# Altium PCB PCB.PcbDoc
Units mil, origin at the board's own origin, x right, y up, seen from the top; angles counter-clockwise.
Board outline 2887.03 x 2121.03 mil, 2 copper layers (Top Layer, Bottom Layer); 72 components, 66 nets, 311 pads, 36 vias.
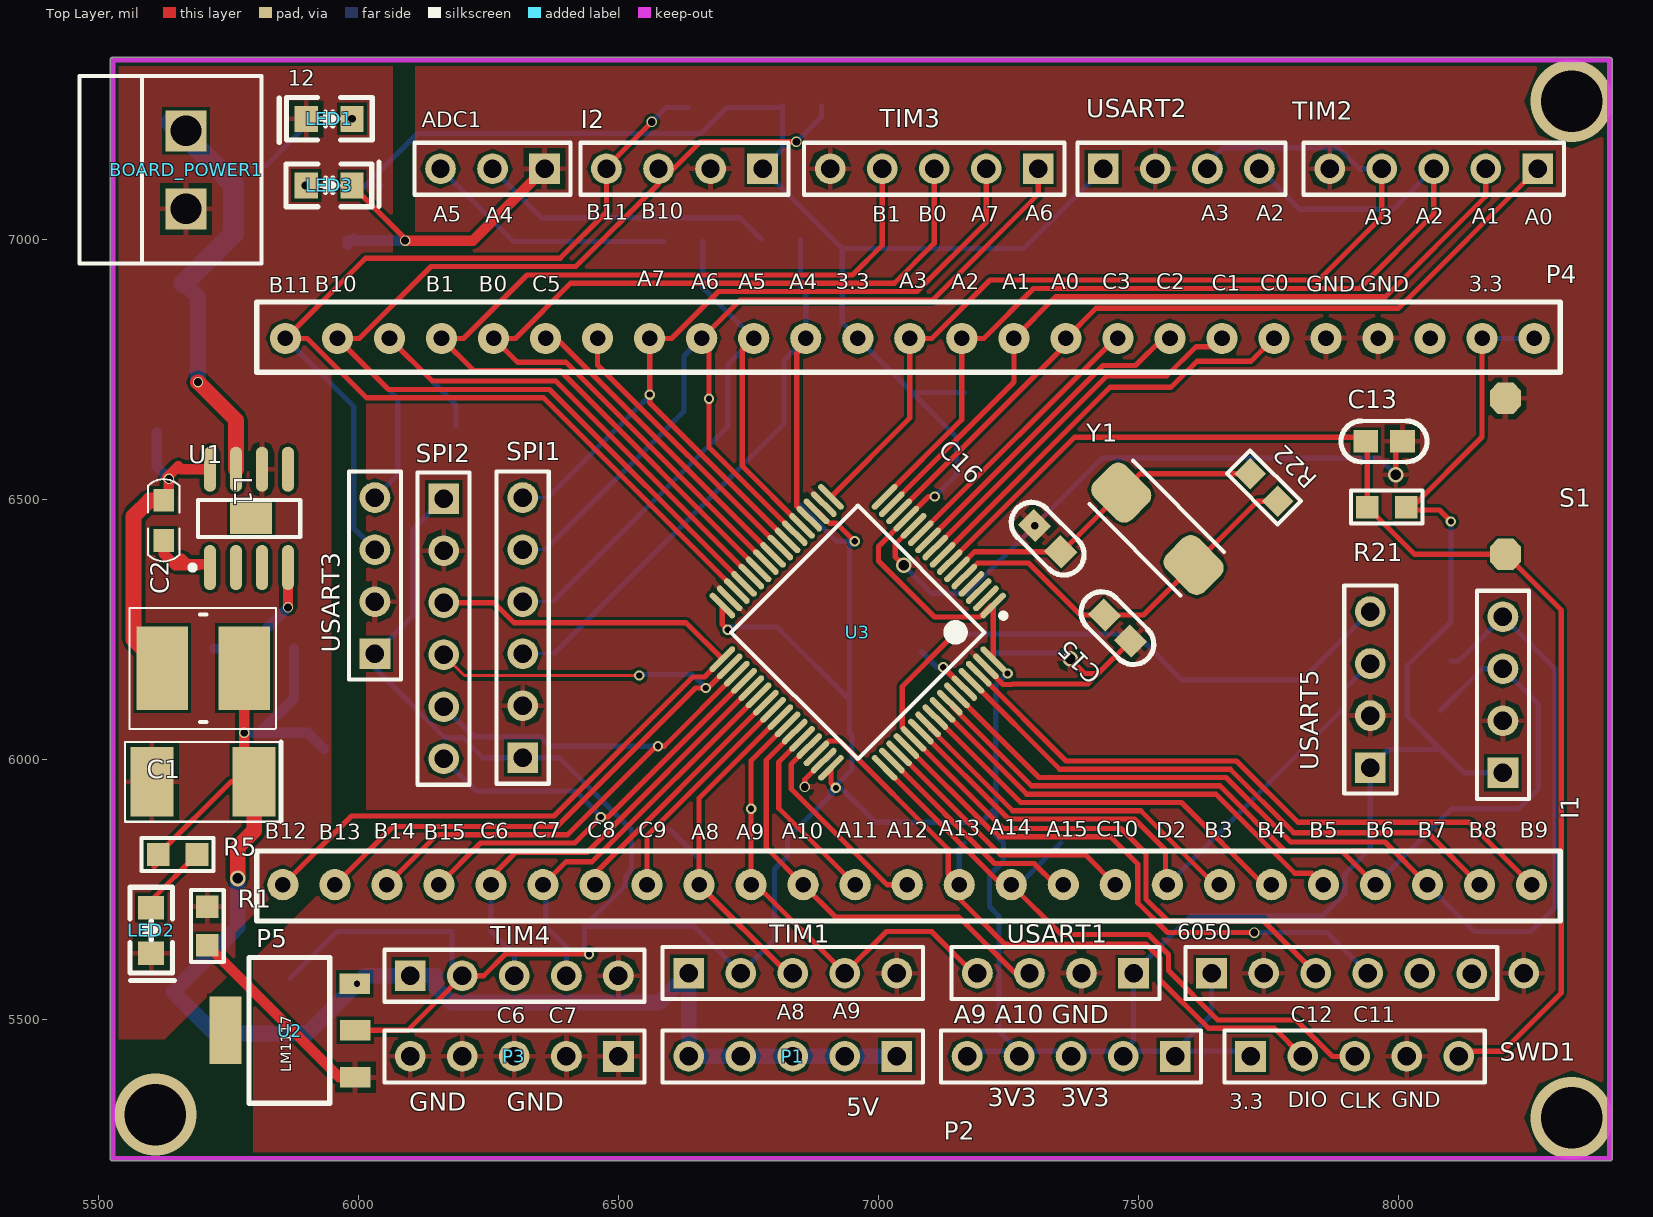
[diagram p0: Top Layer view]
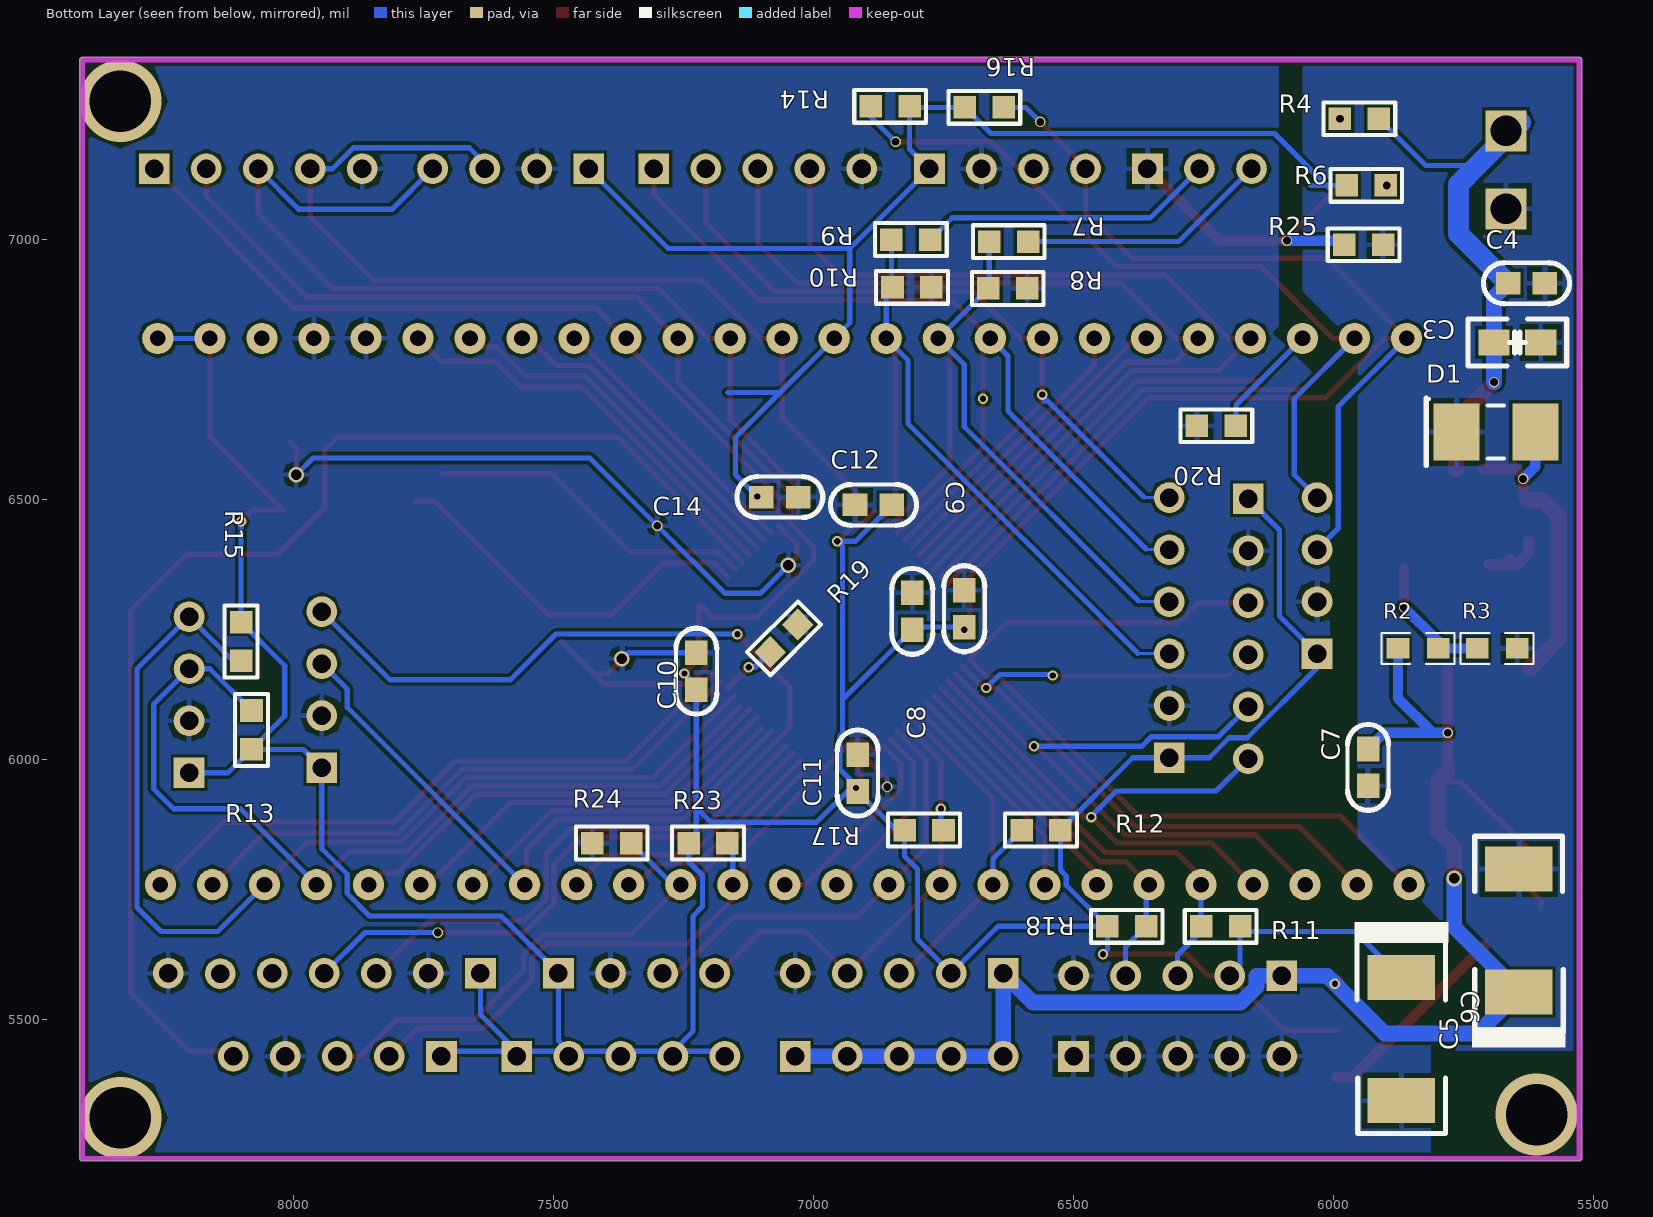
[diagram p1: Bottom Layer view, seen from below]

## Layer stack, top to bottom
Top Layer: signal copper 1.4
Dielectric: dielectric 12.6, FR-4, Dk 4.8
Bottom Layer: signal copper 1.4

## Board outline
5522.98,5234 ccw(c5528,5234) 5528,5228.98 8405,5228.98 ccw(c8405,5234) 8410.01,5234 8410.01,7345 ccw(c8405,7345) 8405,7350.02 5528,7350.02 ccw(c5528,7345) 5522.98,7345

## Design rules (kind name [scope] priority, off if disabled: settings)
Clearance [All] p1: gap=6
PolygonConnect [All] p1: connectstyle=Relief reliefconductorwidth=10 reliefentries=4 polygonreliefangle="90 Angle" airgapwidth=10
RoutingVias [All] p1: holewidth=28 width=50 viastyle="Through Hole" minholewidth=10 minwidth=10 maxholewidth=50 maxwidth=50
SolderMaskExpansion [All] p1: expansion=4
Width [All] p1: maxlimit=100 minlimit=6 preferedwidth=15 minimp=50.000000 maximp=50.000000 favimp=50.000000
28 further rules are at their usual default settings.

## Classes and differential pairs
component class 最小系统: C9 C10 C11 C12 C13 C14 C15 C16 P4 P5 R19 R20 R21 R22 R23 R24 S1 SWD1 U3 Y1
component class 原理图: 6050 ADC1 BOARD_POWER1 C1 C2 C3 C4 C5 C6 C7 C8 D1 I1 I2 L1 LED1 LED2 LED3 P1 P2 P3 R1 R2 R3 R4 R5 R6 R7 R8 R9 R10 R11 R12 R13 R14 R15 R16 R17 R18 SPI1 SPI2 TIM1 TIM2 TIM3 TIM4 U1 U2 USART1 USART2 USART3 USART5

## Components (designator, comment, footprint, x,y, rotation, side; value= is the part's Value field where it differs from the comment)
6050 "Header 6" "HDR1X6- duplicate" 7640,5590 r0 top
ADC1 "Head_3" HDR1X3 6358,7136 r180 top
BOARD_POWER1 "Header 2" Green_2P 5764,7134 r270 top
C1 "107UF" "6032C  TA" 5800,5958 r180 top
C2 "104" "0603- C" 5626,6460 r90 top
C3 "10uf" 0805C 5602,6802 r0 bottom
C4 "Cap" CAP-MLCC-0603 5594,6916 r180 bottom
C5 "Cap Pol1" 6032C 5644,5554 r270 bottom
C6 "Cap Pol1" 6032C 5870,5581.22 r90 bottom
C7 "Cap" CAP-MLCC-0603 5934,5950 r270 bottom
C8 "Cap" CAP-MLCC-0603 6810,6320.87 r90 bottom
C9 "Cap" CAP-MLCC-0603 6710,6255 r270 bottom
C10 "Cap" CAP-MLCC-0603 7225,6135 r270 bottom
C11 "Cap" CAP-MLCC-0603 6915,5939.13 r270 bottom
C12 "Cap" CAP-MLCC-0603 6849.13,6490 r180 bottom
C13 "Cap" CAP-MLCC-0603 7936,6612 r180 top
C14 "Cap" CAP-MLCC-0603 7100,6505 r0 bottom
C15 "Cap" CAP-MLCC-0603 7484,6228 r315 top
C16 "Cap" CAP-MLCC-0603 7300,6450 r135 top
D1 "D" "D RS1M" 5764,6630 r180 bottom
I1 "Header 4" HDR1X4 8200,5975 r90 top
I2 "Header 4" HDR1X4 6777,7136 r180 top
L1 "L" CD_54 5702,6176 r0 top
LED1 "lED" 0805D 5988,7232 r180 top
LED2 "lED" 0805D 5602,5716 r270 top
LED3 "lED" 0805D 5900,7104 r0 top
P1 "Header 5" HDR1X5 7035,5430 r180 top
P2 "Header 5" HDR1X5 7570,5430 r180 top
P3 "Header 5" HDR1X5 6500,5430 r180 top
P4 "IO" "Header 25" 5860,6810 r0 top
P5 "IO" "Header 25" 8255,5760 r180 top
R1 "Res1" RES-0603 5710,5718 r90 top
R2 "10K" 0603-R 5838,6214 r0 bottom
R3 "3.24K" 0603-R 5686,6214 r180 bottom
R4 "Res1" RES-0603 5988,7232 r0 bottom
R5 "Res1" RES-0603 5690,5818 r0 top
R6 "Res1" RES-0603 5900,7104 r180 bottom
R7 "Res1" RES-0603 6662,6996 r0 bottom
R8 "Res1" RES-0603 6664,6906 r0 bottom
R9 "Res1" RES-0603 6850,7000 r0 bottom
R10 "Res1" RES-0603 6848,6908 r0 bottom
R11 "Res1" RES-0603 6180,5680 r180 bottom
R12 "Res1" RES-0603 6525.2,5865 r180 bottom
R13 "Res1" RES-0603 8080,6094.8 r90 bottom
R14 "Res1" RES-0603 6890,7256 r0 bottom
R15 "Res1" RES-0603 8100,6190 r270 bottom
R16 "Res1" RES-0603 6634,7254 r180 bottom
R17 "Res1" RES-0603 6824.8,5865 r0 bottom
R18 "Res1" RES-0603 6435,5680 r0 bottom
R19 "Res1" RES-0603 7082.89,6207.11 r315 bottom
R20 "Res1" RES-0603 6188,6642 r180 bottom
R21 "Res1" RES-0603 7939.13,6485.87 r180 top
R22 "Res1" RES-0603 7714,6550 r135 top
R23 "Res1" RES-0603 7165.2,5840 r180 bottom
R24 "Res1" RES-0603 7350,5840 r180 bottom
R25 "Res1" RES-0603 5980,6990 r0 bottom (schematic designator R1)
S1 "SW-PB" "key - duplicate" 8205,6515 r90 top
SPI1 "Header 6" HDR1X6 6316,6004 r90 top
SPI2 "Header 6" HDR1X6 6164,6502 r270 top
SWD1 "Header 5" HDR1X5 7715,5430 r0 top
TIM1 "Header 5" HDR1X5 6635,5590 r0 top
TIM2 "Header 5" HDR1X5 8267,7136 r180 top
TIM3 "Header 5" HDR1X5 7307,7136 r180 top
TIM4 "Header 5" HDR1X5 6100,5585 r0 top
U1 "TPS5430" SOIC-8piN 5790,6464 r90 top
U2 "tlv1117-3.3" LM1117 5870,5470 r90 top
U3 "stm32F103RCT6" STM32F103RCT6 6960,6245 r225 top
USART1 "Header 4" HDR1X4 7490,5590 r180 top
USART2 "Header 4" HDR1X4 7432,7136 r0 top
USART3 "Header 4" HDR1X4 6032,6204 r90 top
USART5 "Header 4" HDR1X4 7945,5985 r90 top
Y1 "8M" Osc-6032 7536,6444 r315 top

## Footprints (in the part's own frame and the unit in brackets; to place one, negate y for a bottom-side part, rotate by r counter-clockwise, add the part's x,y. Pads: shape width x height; smd on the part's side, far side on the other; paste and mask are expansions set on the pad)
"0603- C" [mm] "贴片带丝印"
  rect 1.1x1 smd: 1(-0.977,0) 2(0.977,0)
  silkscreen extent -1.99,-0.76 2.02,0.76, body extent -1.14,-0.38 1.14,0.38, height 1
0603-R [mm] "贴片带丝印"
  rect 1.1x1 smd: 1(-0.977,0) 2(0.977,0)
  silkscreen extent -1.78,-0.76 1.78,0.76, body extent -1.14,-0.38 1.14,0.38, height 1
0805C [mil]
  rect 60x50 smd: 1(0,0) 2(90,0)
  silkscreen extent -50,-45 140,45
0805D [mil]
  rect 45x50 smd: A(0,0) K(88,0)
  silkscreen extent -39,-41 140,45
6032C [mm]
  rect 2.2x3.3 smd: 1(0,0) 2(-6,0)
  silkscreen extent -7.6,-2.3 2.72,2.27
"6032C  TA" [mm]
  rect 2.1x3.4 smd: 1(0,0) 2(5,0)
  silkscreen extent -1.31,-1.93 6.31,1.96, body extent -0.6,-1.7 5.6,1.7, height 2.9
CAP-MLCC-0603 [mm]
  rect 1.2x1.1 smd: 1(0,0) 2(-1.8,0)
  silkscreen extent -3,-1 1.2,1, body extent -1.77,-0.47 -0.02,0.48, height 0.85
CD_54 [mm]
  rect 2.5x4.064 smd: 1(-2,0) 2(2,0)
  silkscreen extent -3.61,-2.97 3.56,2.95, body extent -3,-2.7 3,2.7, height 4
"D RS1M" [mm]
  rect 2.25x2.8 smd: A(0,0) K(3.85,0)
  silkscreen extent -1.47,-1.63 2.32,1.66, body extent -0.72,-1.4 4.57,1.39, height 2.3
Green_2P [mm]
  rect 2x2 hole 1.5: 1(-1.905,-2.413) 2(1.905,-2.413)
  silkscreen extent -4.57,-7.62 4.57,1.27
HDR1X3 [mm] "Connector; Header; 3 Position"
  rect 1.5x1.5 hole 0.9: 1(0,0)
  round 1.5 hole 0.9: 2(2.54,0) 3(5.08,0)
  silkscreen extent -1.27,-1.27 6.35,1.27
HDR1X4 [mm] "Connector; Header; 4 Position"
  rect 1.5x1.5 hole 0.9: 1(0,0)
  round 1.5 hole 0.9: 2(2.54,0) 3(5.08,0) 4(7.62,0)
  silkscreen extent -1.27,-1.27 8.89,1.27
HDR1X5 [mm] "Connector; Header; 5 Position"
  rect 1.5x1.5 hole 0.9: 1(0,0)
  round 1.5 hole 0.9: 2(2.54,0) 3(5.08,0) 4(7.62,0) 5(10.16,0)
  silkscreen extent -1.27,-1.27 11.43,1.27
HDR1X6 [mm] "Connector; Header; 5 Position"
  rect 1.5x1.5 hole 0.9: 1(0,0)
  round 1.5 hole 0.9: 2(2.54,0) 3(5.08,0) 4(7.62,0) 5(10.16,0) 6(12.7,0)
  silkscreen extent -1.27,-1.27 13.97,1.27
"HDR1X6- duplicate" [mm]
  rect 1.5x1.5 hole 0.9: 1(0,0)
  round 1.5 hole 0.9: 2(2.54,0) 3(5.08,0) 4(7.62,0) 5(10.16,0) 6(12.7,-0.025)
  silkscreen extent -1.27,-1.27 13.94,1.27
"Header 25" [mil]
  round 60 hole 30: 1(0,0) 2(100,0) 3(200,0) 4(300,0) 5(400,0) 6(500,0) 7(600,0) 8(700,0) 9(800,0) 10(900,0) 11(1000,0) 12(1100,0) 13(1200,0) 14(1300,0) 15(1400,0) 16(1500,0) 17(1600,0) 18(1700,0) 19(1800,0) 20(1900,0) 21(2000,0) 22(2100,0) 23(2200,0) 24(2300,0) 25(2400,0)
  silkscreen extent -55,-65 2450,70
"key - duplicate" [mil]
  oct 60x60 smd: 1(-120,0) 2(180,0)
LM1117 [mm]
  rect 1x1.5 smd: 1(-2.043,-3.148) 2(0.256,-3.148) 3(2.53,-3.123)
  rect 3.3x1.549 smd: 4(0.254,3.175)
  silkscreen extent -3.3,-1.91 3.81,2.03
Osc-6032 [mm]
  rrect50% 2.6x2.2 smd: 1(-2.5,0) 2(2.5,0)
  silkscreen extent -3.2,-1.5 3.1,1.5
RES-0603 [mm]
  rect 1.1x1.1 smd: 1(0,0) 2(-1.9,0)
  silkscreen extent -2.7,-0.8 0.8,0.8, body extent -1.8,-0.47 -0.1,0.48, height 0.6
SOIC-8piN [mm] "SOIC, 8-Leads, Body 4.90x3.90mm, Pitch 1.27mm, IPC Medium Density"
  rect 1.528x2.036 smd: 0(0,-0.102)
  oval 2.2x0.6 smd: 1(-2.4,1.905) 2(-2.4,0.635) 3(-2.4,-0.635) 4(-2.4,-1.905) 5(2.4,-1.905) 6(2.4,-0.635) 7(2.4,0.635) 8(2.4,1.905)
  silkscreen extent -2.52,-2.5 0.9,2.88, body extent -2,-2.5 2,2.5, height 1.7
STM32F103RCT6 [mm]
  oval 1.65x0.3 smd: 1(-5.6,3.75) 2(-5.6,3.25) 3(-5.6,2.75) 4(-5.6,2.25) 5(-5.6,1.75) 6(-5.6,1.25) 7(-5.6,0.75) 8(-5.6,0.25) 9(-5.6,-0.25) 10(-5.6,-0.75) 11(-5.6,-1.25) 12(-5.6,-1.75) 13(-5.6,-2.25) 14(-5.6,-2.75) 15(-5.6,-3.25) 16(-5.6,-3.75) 33(5.6,-3.75) 34(5.6,-3.25) 35(5.6,-2.75) 36(5.6,-2.25) 37(5.6,-1.75) 38(5.6,-1.25) 39(5.6,-0.75) 40(5.6,-0.25) 41(5.6,0.25) 42(5.6,0.75) 43(5.6,1.25) 44(5.6,1.75) 45(5.6,2.25) 46(5.6,2.75) 47(5.6,3.25) 48(5.6,3.75)
  oval 0.3x1.65 smd: 17(-3.75,-5.6) 18(-3.25,-5.6) 19(-2.75,-5.6) 20(-2.25,-5.6) 21(-1.75,-5.6) 22(-1.25,-5.6) 23(-0.75,-5.6) 24(-0.25,-5.6) 25(0.25,-5.6) 26(0.75,-5.6) 27(1.25,-5.6) 28(1.75,-5.6) 29(2.25,-5.6) 30(2.75,-5.6) 31(3.25,-5.6) 32(3.75,-5.6) 49(3.75,5.6) 50(3.25,5.6) 51(2.75,5.6) 52(2.25,5.6) 53(1.75,5.6) 54(1.25,5.6) 55(0.75,5.6) 56(0.25,5.6) 57(-0.25,5.6) 58(-0.75,5.6) 59(-1.25,5.6) 60(-1.75,5.6) 61(-2.25,5.6) 62(-2.75,5.6) 63(-3.25,5.6) 64(-3.75,5.6)
  silkscreen extent -5.72,-4.38 4.37,4.57, body extent -5,-5 5,5, height 1.6

## Part data
6050: "接插件"
BOARD_POWER1: "Header, 2-Pin"
C1: library part Cap_2, "钽电容"
C2 C3: library part Cap
C4 C7 C8 C13: "Capacitor"
C5 C6: "Polarized Capacitor (Radial)"
C9 C10 C11 C12 C14 C15 C16: library part Cap_1, "Capacitor"
I1 I2 USART1 USART2 USART3 USART5: "Header, 4-Pin"
L1: "电感"
LED1 LED2 LED3: library part 00-D-LED, "LED"
P1 P2 P3 SWD1 TIM1 TIM2 TIM3 TIM4: "Header, 5-Pin"
P4 P5: library part "Header 25", "Header, 25-Pin"
R1 R4 R5 R6 R7 R8 R9 R10 R11 R12 R13 R14 R15 R16 R17 R18 R25: "Resistor"
R2 R3: library part R
R19 R20 R21 R22 R23 R24: library part Res1_1, "Resistor"
S1: "Switch"
SPI1 SPI2: "Header, 6-Pin"
U2: library part LM1117IMP-5.0, "800mA Low-Dropout Linear Regulator"
Y1: library part C-Osc, "Crystal Oscillator"

## Free pads (board coordinates)
  round 59 hole 35.43: 0(8240,5590)

## Via types
v1: diameter 20, hole 12, Top Layer to Bottom Layer, 17 vias
v2: diameter 20, hole 15, Top Layer to Bottom Layer, 12 vias
v3: diameter 30, hole 20, Top Layer to Bottom Layer, 4 vias
v4: diameter 157.48, hole 118.11, Top Layer to Bottom Layer, 3 vias

## Nets (pads, with @x,y where several pads share a name; then routed paths per layer and width w, separated by ;. In a path a pad name is that pad's centre, name@x,y a point inside that pad or via, vN(x,y) a via of type N, cw(c..) or ccw(c..) an arc to the next point about the centre after c; other vN are vias at no path point)
3V3: 6050.1 C6.1 C8.2 C9.1 C10.1 C11.1 C12.1 C14.1 I1.1 I2.1 P2.1 P2.2 P2.3 P2.4 P2.5 P4.12 P4.24 P4.25 R6.2 R11.1 R12.1 R13.2 R14.2 R15.2 R16.2 R17.1 R18.1 R21.2 R23.2 SPI1.1 SPI2.1 SWD1.1 TIM1.2 TIM4.2 U2.2 U3.1 U3.13 U3.19 U3.32 U3.48 U3.64 USART1.1 USART2.1 USART3.1 USART5.1 | length 11393.6
  Top Layer w10: U2.2 6095.08,5480.08 TIM4.2 6241.27,5585 6282.8,5626.53 v1(6443.47,5626.53) ; U3.32 6699.71,6260.29 v1(6710,6250) ; U3.19 6883.18,6477.45 6905.95,6454.68 6919.32,6454.68 v1(6954,6420) ; U3.48 6908.5,5955.5 v1(6918,5946) ; v1(7108,6506) 7095.73,6506 U3.13 7000,6410.27 7000,6382 7107.28,6274.72 7194.59,6274.72 7216.36,6296.5 U3.1 U3.64 v1(7247.9,6165.9) ; v1(8100,6458) 8078,6480 8019.8,6480 8160,6620.2 P4.24
  Bottom Layer w10: C6.1 5958.78,5670 6180,5670 6180,5605 TIM4.2 ; R6.2 6044,7104 ; 6010,7100 6114,7204 6658.8,7204 R16.2 6813.2,7254 R14.2 6815.2,7174.2 I2.1 6930,6983 ; SPI2.1 6104,6442 6104,6276 USART3.1 6032,6176.69 6166.16,6042.53 6200.85,6042.53 6239.37,6004 SPI1.1 6386.2,6004 R12.1 6525.2,5788.18 6514,5776.98 6514,5759 R18.1 ; v1(6443.47,5626.53) 6435,5635 R18.1 ; C9.1@6707,6252 C9.1 6805,6255 C8.2 6944,6116 ; C12.1 6919.13,6420 v1(6954,6420) 6944,6410 6944,6116 ; v1(6918,5946) 6928,5946 6994,5880 7197,5880 7225,5908 ; v1(7108,6506) 7150,6548 7150,6620 7064,6706 ; 7165.2,6706 7064,6706 ; P2.5@7170,5440 P2.4@7270,5440 ; v1(7247.9,6165.9) 7225,6143 C10.1 7225,5908 ; USART2.1 7279,6983 6930,6983 ; 6050.1 7640,5510 P2.1@7570,5440 ; SWD1.1@7715,5440 P2.1@7570,5440 ; v1(8100,6458) R15.2 8016,6180.8 8016,6084 R13.2 ; P4.24@8160,6832 P4.24 P4.25 ; I1.1 8125,5975 R13.2 ; R18.1 6645,5680 TIM1.2 6800,5655 6800,5790 6824.8,5814.8 R17.1 6840.87,5865 C11.1 6906.38,5939.13 6948.65,5981.41 6948.65,6045.62 6944,6050.28 6944,6116 ; 6930,6983 6930,6840 P4.12 7064,6706 ; 7225,5908 7225,5855 R23.2 7240,5804.4 7213,5777.4 7213,5718 7231.53,5699.47 7231.53,5478.47 P2.4@7270,5440 ; P2.4@7270,5440 P2.2@7470,5440 ; P2.2@7470,5440 7490,5460 USART1.1 7600,5700 7852.98,5700 7896,5743.02 7896,5780 7945,5829 USART5.1 7980,6020 R13.2 ; P2.2@7470,5440 P2.1@7570,5440
5V: C1.1 C5.1 C7.2 L1.2 P1.1 P1.2 P1.3 P1.4 P1.5 R2.2 R5.2 TIM1.1 TIM4.1 U2.3 | length 3006.4
  Top Layer w10: 5607.2,5794 R5.2@5623.2,5810 ; R5.2 5755.2,5958 C1.1
  Top Layer w20: C1.1@5780.74,5977.26 v2(5780.74,6052) L1.2
  Top Layer w30: v3(5768,5772) 5768,5832 5800,5864 C1.1 C1.1@5780.74,5977.26 ; U2.3@5995.3,5571.95 v1(5997.62,5569.62)
  Bottom Layer w20: v2(5780.74,6052) 5810,6052 ; R2.2 5876.46,6118.46 5810,6052 ; C7.2 5902.87,6052 5810,6052
  Bottom Layer w30: v3(5768,5772) 5768,5678 C5.1 5724,5474 5902,5474 v1(5997.62,5569.62) 6013,5585 TIM4.1 6148.47,5585 6148.47,5563.66 6178.66,5533.47 6578.47,5533.47 TIM1.1 P1.5 P1.4 P1.3 P1.2 P1.1
12V: BOARD_POWER1.1 C3.2 C4.2 R4.2 U1.7 | length 1023.2
  Top Layer w30: v2(5692,6726) 5765,6653 U1.7
  Bottom Layer w10: 5724,7142 5823.2,7142 R4.2
  Bottom Layer w30: C4.2 5692,6888.87 C3.2 v2(5692,6726)
  Bottom Layer w40: BOARD_POWER1.1@5641,7225 5724,7142 5760,7106 5760,7011.13 C4.2
BOOT0: R19.1 U3.60 | length 110.4
  Top Layer w11: v1(7124.44,6178) U3.60
  Bottom Layer w11: R19.1 7112,6178 v1(7124.44,6178)
BOOT1: P4.3 R20.1 U3.28 | length 1106
  Top Layer w10: P4.3 6142,6728 6379.56,6728 U3.28
  Bottom Layer w10: P4.3 6188,6682 R20.1
GND: 6050.2 ADC1.1 C6.2 C8.1 C9.2 C10.2 C11.2 C12.2 C13.2 C14.2 C15.1 C16.1 I1.2 I2.2 LED3.K P3.1 P3.2 P3.3 P3.4 P3.5 P4.21 P4.22 pad.0 R1.2 R8.2 R10.2 R19.2 R20.2 R24.2 R25.1 S1.2 SPI1.2 SPI2.2 SWD1.4 TIM1.5 TIM2.5 TIM3.5 TIM4.5 U2.1 U3.12 U3.18 U3.31 U3.47 U3.63 USART1.2 USART2.2 USART3.2 USART5.2 | length 2857
  Top Layer w10: LED3.K 6090,7002 v2(6090,6998) ; v2(6858,5948) 6858,5962.05 U3.47 ; v3(7048,6374) 7032,6390 7032,6414.44 U3.12 ; U3.63 7206.37,6177.72 7239.2,6144.9 7256.59,6144.9 7257.7,6146 7402,6146 7422,6166 ; v3(7368,6194) 7396,6166 7422,6166 ; C15.1 7422,6166 ; v3(7994,6548) 7994,6599.13 C13.2
  Top Layer w20: R1.2 5963.64,5389.55 U2.1 ; v2(6090,6998) 6220,6998 ADC1.1
  Bottom Layer w10: C11.2@6898,6002 C11.2@6903.3,6002 ; v3(7048,6374) 7102,6320 7170,6320 v2(7300,6450) 7430,6580 7962,6580 v3(7994,6548) ; C10.2 7356.13,6205.87 v3(7368,6194)
  Bottom Layer w20: R25.1 R25.1@5988,6998 ; R25.1@5980,6998 R25.1@5988,6998 ; R25.1@5992,7002 R25.1@5988,6998 ; v2(6090,6998) R25.1@5988,6998
NetADC1_2: ADC1.2 R9.2 | length 573.5
  Bottom Layer w10: ADC1.2 6352,7042 6733.2,7042 R9.2
NetADC1_3: ADC1.3 R7.2 | length 487.2
  Bottom Layer w10: ADC1.3 6298,6996 R7.2
NetC2_1: C2.1 U1.1 | length 145.8
  Top Layer w20: C2.1 5626,6396 5648,6374 5691.49,6374 ; 5660.77,6386.77 5671.54,6376 5702,6376
NetC2_2: C2.2 D1.K L1.1 U1.8 | length 624.5
  Top Layer w20: C2.2 5636,6508.46 v2(5636,6540) ; v2@5632.77,6543.23 5654.02,6564.49 5660.02,6558.49 U1.8
  Top Layer w30: L1.1 5568,6231.26 5568,6468 5598.46,6498.46 C2.2
  Bottom Layer w20: D1.K 5612.43,6563.57 v2(5636,6540)
NetLED1_A: LED1.A R4.1
  other v2: 5988,7232
NetLED2_A: LED2.A R5.1 | length 138.5
  Top Layer w10: LED2.A 5602,5730 R5.1
NetLED3_A: LED3.A R6.1
  other v2: 5898,7104
NetR2_1: R2.1 R3.1 U1.4 | length 257.7
  Top Layer w20: v2(5865,6293) U1.4
  Bottom Layer w20: R3.1 R2.1 5799.54,6227.54 v2(5865,6293)
NRST: C13.1 R21.1 S1.1 SWD1.5 U3.7 | length 2455.5
  Top Layer w10: U3.7 7376.76,6620 7914.13,6620 7939.13,6595 R21.1 8030,6395 S1.1 8312,6288 8312,5552 8200,5440 SWD1.5@8115,5440
OLEDRESET: P4.7 U3.24 | length 547.6
  Top Layer w10: P4.7 6460,6758.92 U3.24
OSC32_IN: U3.3
OSC32_OUT: U3.4
OSCIN: C15.2 R22.2 U3.5 Y1.2 | length 745.1
  Top Layer w10: U3.5 7190.44,6378 7288,6378 7387.89,6278.11 C15.2 7509.3,6278.11 Y1.2 7728.3,6497.11 R22.2
OSCOUT: C16.2 R22.1 U3.6 Y1.1 | length 639.5
  Top Layer w10: U3.6 7184.49,6399.89 C16.2 7352.7,6399.89 Y1.1 7502.81,6550 R22.1
PA0: P4.16 TIM2.1 U3.14 | length 1507.4
  Top Layer w10: U3.14 7360,6798.11 P4.16 7418,6868 7999,6868 TIM2.1
PA1: P4.15 TIM2.2 U3.15 | length 1488.9
  Top Layer w10: U3.15 7260,6725.95 P4.15 7340,6890 7974,6890 8167,7083 TIM2.2
PA2: P4.14 TIM2.3 U3.16 USART2.4 | length 1858.8
  Top Layer w10: U3.16 7160,6653.79 P4.14 7202.02,6810 7298.02,6906 7924,6906 8067,7049 TIM2.3
  Bottom Layer w10: USART2.4 7810,7058 7989,7058 TIM2.3
PA3: P4.13 TIM2.4 U3.17 USART2.3 | length 1839
  Top Layer w10: U3.17 7060,6656.8 P4.13 7102.02,6810 7214.02,6922 7846,6922 7967,7043 TIM2.4
  Bottom Layer w10: USART2.3 7632,7147.06 7661.47,7176.53 7883.79,7176.53 7924.31,7136 TIM2.4
PA4: P4.11 R9.1 R10.1 SPI1.3 U3.20 | length 1422.6
  Top Layer w10: P4.11 6845.96,6795.96 6845.96,6785.08 6842.88,6782 6842.88,6487.39 U3.20
  Bottom Layer w6: SPI1.3 6376,6204
  Bottom Layer w10: 6377,6205 6818,6646 6818,6768 P4.11 6860,6896 6850,6906 R9.1
PA5: P4.10 R7.1 R8.1 SPI1.4 U3.21 | length 1366.1
  Top Layer w10: P4.10 6738,6788 6738,6564.44 U3.21
  Bottom Layer w6: SPI1.4 6374,6304
  Bottom Layer w10: 6375,6305 6710,6640 6710,6760 P4.10 R8.1 6662,6908 R7.1
PA6: P4.9 SPI1.5 TIM3.1 U3.22 | length 1833.7
  Top Layer w10: U3.22 6674,6600.6 v1(6674,6693.8) 6674,6796 P4.9 6734,6884 7104,6884 7307,7087 TIM3.1
  Bottom Layer w6: SPI1.5 6360,6404
  Bottom Layer w10: 6361,6405 6626,6670 6626,6776 P4.9 ; v1(6674,6693.8) v1@6675.2,6695
PA7: P4.8 SPI1.6 TIM3.2 U3.23 | length 1656.7
  Top Layer w10: U3.23 6560,6686.76 v1(6560,6702) P4.8 6602.02,6810 6692.02,6900 7074,6900 7207,7033 TIM3.2
  Bottom Layer w6: SPI1.6 6364,6504
  Bottom Layer w10: 6365,6505 6550,6690 6556.76,6690
PA8: P5.17 R12.2 TIM1.3 U3.41 | length 765
  Top Layer w10: P5.17 6655,5926.08 U3.41
  Top Layer w11: P5.17 6825,5590 TIM1.3
  Bottom Layer w10: R12.2 6655,5810 P5.17
PA9: P5.16 R17.2 TIM1.4 U3.42 USART1.4 | length 952
  Top Layer w10: U3.42 6755,5998.24 v1(6755,5906) P5.16 6765,5760 TIM1.4 7015,5670 7102,5670 7182,5590 USART1.4
  Bottom Layer w10: R17.2 6755,5870 v1(6755,5906)
PA10: P5.15 U3.43 USART1.3 | length 851.9
  Top Layer w10: U3.43 6784,5999.4 6784,5831 P5.15 6917,5698 7154,5698 7262,5590 USART1.3
PA11: P5.14 U3.44 | length 359.8
  Top Layer w10: U3.44 6808,5995.56 6808,5907 P5.14
PA12: P5.13 U3.45 | length 396.1
  Top Layer w10: U3.45 6832,5991.73 6832,5944 7016,5760 P5.13
PA13: P5.12 R23.1 SWD1.2 U3.46 | length 1338.5
  Top Layer w10: U3.46 6904.11,6036 6926,6036 7134,5828 ; 7134,5819.28 7134,5781 P5.12 7155,5733 7242,5646 7514,5646 7541,5619 7541,5577 7634,5484 7761,5484 SWD1.2
  Bottom Layer w10: P5.12 7155,5829.8 R23.1
PA14: P5.11 R24.1 SWD1.3 U3.49 | length 1279.3
  Top Layer w10: U3.49 7236.21,5760 P5.11 7351,5664 7518.63,5664 7557,5625.63 7557,5595 7652,5500 7802.31,5500 7872.31,5430 SWD1.3
  Bottom Layer w10: P5.11 7270,5760 R24.1
PA15: P5.10 U3.50 | length 428.4
  Top Layer w10: U3.50 7223.05,5801 7299,5801 7340,5760 P5.10
PB0: P4.5 TIM3.3 U3.26 | length 1767.1
  Top Layer w10: U3.26 6399.24,6764 6306,6764 P4.5 6302.02,6810 6408.02,6916 7030,6916 7107,6993 TIM3.3
PB1: P4.4 TIM3.4 U3.27 | length 1861.3
  Top Layer w10: U3.27 6387.4,6748 6222,6748 P4.4 6202.02,6810 6324.02,6932 6950,6932 7007,6989 TIM3.4
PB3: P5.7 U3.55 | length 678.7
  Top Layer w10: U3.55@7100.36,6059.64 7258,5902 7504,5902 7646,5760 P5.7
PB4: P5.6 U3.56 | length 779.5
  Top Layer w10: U3.56 7273.08,5918 7582,5918 7740,5760 P5.6
PB5: P5.5 U3.57 | length 871.3
  Top Layer w10: U3.57 7284.92,5934 7648,5934 7800,5782 7833,5782 P5.5
PB6: I1.3 P5.4 R13.1 U3.58 | length 1756.1
  Top Layer w10: U3.58@7142.12,6101.88 7294,5950 7656,5950 7782,5824 7891,5824 P5.4
  Bottom Layer w10: P5.4 8101,5906 8230,5906 8268,5944 8268,6107 I1.3 8160.2,6175 R13.1
PB7: I1.4 P5.3 R15.1 U3.59 | length 2092
  Top Layer w10: U3.59 7308.6,5966 7668,5966 7792,5842 7973,5842 P5.3
  Bottom Layer w10: P5.3 8145,5670 8254,5670 8300,5716 8300,6175 I1.4 8115,6190 R15.1
PB8: P5.2 U3.61 | length 1138.7
  Top Layer w10: U3.61 7348.27,5982 7676,5982 7798,5860 8055,5860 P5.2
PB9: P5.1 U3.62 | length 1230.6
  Top Layer w10: U3.62 7360.11,5998 7688,5998 7806,5880 8135,5880 P5.1
PB10: I2.3 P4.2 R14.1 U3.29 USART3.4 | length 2492.6
  Top Layer w10: U3.29 6367.73,6712 6058,6712 P4.2 6002.02,6810 6140.02,6948 6418,6948 6577,7107 I2.3 6606,7136 6658,7188 v2(6842,7188)
  Bottom Layer w10: P4.2 6076,6694 6076,6548 USART3.4 ; v2(6842,7188) 6890,7236 R14.1
PB11: I2.4 P4.1 R16.1 U3.30 USART3.3 | length 2554.2
  Top Layer w10: v2(6564,7226) 6477,7139 I2.4 6477,7053 6388,6964 6014,6964 P4.1 5902.02,6810 6016.02,6696 6355.89,6696 U3.30
  Bottom Layer w10: P4.1 5991.47,6678.53 5991.47,6444.53 USART3.3 ; v2(6564,7226) 6592,7254 R16.1
PB12: P5.25 SPI2.3 U3.33 | length 1604.9
  Top Layer w10: P5.25 5987,5892 6376,5892 6642.95,6158.95 6665.16,6158.95 U3.33 6629.73,6263.47 6299.21,6263.47 6260.69,6302 SPI2.3
PB13: P5.24 SPI2.4 U3.34 | length 1466.3
  Top Layer w6: SPI2.4 6204,6162 v1(6540,6162)
  Top Layer w10: P5.24 6067,5872 6382,5872 6647.95,6137.95 v1(6668.05,6137.95) ; v1@6668.05,6134 U3.34
  Bottom Layer w10: v1(6540,6162) 6542,6164 6642,6164 v1(6668.05,6137.95)
PB14: P5.23 SPI2.5 U3.35 | length 1284.1
  Top Layer w10: P5.23 6151,5856 6402,5856 6572,6026 v1(6576,6026) 6587.89,6026 U3.35
  Bottom Layer w10: SPI2.5 6221.47,6044.53 6350.08,6044.53 6368.61,6026 v1(6576,6026)
PB15: P5.22 SPI2.6 U3.36 | length 1086.4
  Top Layer w10: P5.22 6235,5840 6416,5840 v1(6466,5890) 6479.73,5890 U3.36
  Bottom Layer w10: SPI2.6 6226,5940 6418,5940 6459,5899
PC0: P4.20 U3.8 | length 809.5
  Top Layer w10: U3.8 7444.92,6716 7562,6716 7612,6766 7716,6766 P4.20
PC1: P4.19 U3.9 | length 717.6
  Top Layer w10: U3.9 7439.08,6738 7554,6738 7610,6794 7644,6794 P4.19
PC2: P4.18 U3.10 | length 625.8
  Top Layer w10: U3.10 7431.24,6758 7494,6758 7546,6810 P4.18
PC3: P4.17 U3.11 | length 533.9
  Top Layer w10: U3.11 7455.4,6810 P4.17
PC5: P4.6 U3.25 | length 609.5
  Top Layer w10: P4.6 6381.08,6810 U3.25
PC6: P5.21 R11.2 TIM4.3 U3.37 | length 859.5
  Top Layer w10: P5.21 6255,5775 6302,5822 6439.56,5822 U3.37
  Bottom Layer w10: P5.21 6254.8,5759.8 6254.8,5670 6300,5624.8 TIM4.3
PC7: P5.20 R18.2 TIM4.4 U3.38 | length 758.7
  Top Layer w10: P5.20 6399,5804 6449.4,5804 U3.38
  Bottom Layer w10: P5.20 6360.2,5754.8 R18.2 6400,5640.2 TIM4.4
PC8: P5.19 U3.39 | length 485.9
  Top Layer w10: P5.19 6455,5781.76 U3.39
PC9: P5.18 U3.40 | length 436.4
  Top Layer w10: P5.18 6555,5853.92 U3.40
PC10: P5.9 U3.51 | length 520.3
  Top Layer w10: U3.51 7234.89,5817 7398,5817 P5.9
PC11: 6050.4 U3.52 | length 1111.2
  Top Layer w10: U3.52 7213.86,5865.86 7219.07,5865.86 7232.94,5852 7446,5852 7498,5800 7498,5725.37 7555.37,5668 v2(7722,5668)
  Bottom Layer w10: v2(7722,5668) 7862,5668 6050.4
PC12: 6050.3 U3.53 USART5.4 | length 2152.3
  Top Layer w10: v1(7146,6241.56) 7045.4,6140.97 7045.4,6062.16 U3.53 7239.56,5868 7466,5868 7514,5820 7514,5732 7556,5690 7740,5690 6050.3
  Bottom Layer w10: v1(7146,6241.56) 7494.44,6241.56 7582,6154 7814,6154 USART5.4
PC13: U3.2
PD2: P5.8 U3.54 USART5.3 | length 1221.3
  Top Layer w10: U3.54 7249.4,5886 7492,5886 7551.5,5826.5 P5.8@7551.5,5756.5
  Bottom Layer w10: P5.8 7896,6101 7896,6136 USART5.3
PGND: BOARD_POWER1.2 C1.2 C3.1 C4.1 C5.2 C7.1 D1.A LED1.K LED2.K R1.1 R3.2 R25.2 U1.6
pads on no net: 6050.5 6050.6 P4.23 U1.0 U1.2 U1.3 U1.5 U2.4
copper on no net:
  other v4: 8332,5312 5610,5318 8332,7266

## Polygon pours and split planes (outlines as drawn)
GND on Top Layer "Bot Layer-GND" (solid, remove dead copper, pour order 11): 6105.72,7360.41 6109.72,7356.41 6109.72,6944.41 6109.72,6932.41 6027.72,6850.41 6015.72,6838.41 6015.72,5848.41 6015.72,5834.41 5825.72,5644.41 5797.72,5616.41 5797.72,5570.41 5797.72,5204.41 5747.72,5154.41 5769.72,5176.41 8589.72,5176.41 8589.72,7290.41 8531.72,7348.41
PGND on Top Layer "Bot Layer-GND" (solid, remove dead copper, pour order 3): 6066,7381.27 6066,6917.27 6042,6893.27 5948,6799.27 5948,6643.27 5948,5859.27 5952,5855.27 5764,5667.27 5764,5615.27 5764,5599.27 5628,5463.27 5438,5463.27 5438,7385.27 5412,7411.27
GND on Bottom Layer "Bot Layer-GND" (solid, remove dead copper, pour order 9): 6105.74,7409.22 6105.74,6833.22 6117.74,6821.22 6031.74,6735.22 6007.74,6735.22 6007.74,5855.22 6055.74,5807.22 5879.74,5631.22 5813.74,5631.22 5813.74,5245.22 5801.74,5233.22 5851.74,5183.22 8547.74,5183.22 8547.74,7413.22 8519.74,7441.22
PGND on Bottom Layer "Bot Layer-GND" (solid, remove dead copper, pour order 7): 6053.65,7390.38 6059.65,7384.38 6059.65,6962.38 6059.65,6900.38 5935.65,6776.38 5953.65,6758.38 5953.65,5872.38 5953.65,5850.38 5729.65,5626.38 5765.65,5590.38 5765.65,5440.38 5479.65,5440.38 5463.65,5456.38 5481.65,5474.38 5481.65,7396.38

## Keep-outs
Keep-Out Layer:
  lines w10: 5528,5234 8405,5234 8405,7345 5528,7345 5528,5234

## Silkscreen, mask and mechanical layers (free items; w line width, h text height)
Top Overlay:
  text "12" at 5864,7296 h30
  text "B10" at 6544,7040 h30
  text "B11" at 6438,7038 h30
  text "A6" at 7282,7036 h30
  text "A3" at 7620,7036 h30
  text "A2" at 7726,7036 h30
  text "A5" at 6144,7034 h30
  text "B1" at 6988,7034 h30
  text "B0" at 7076,7034 h30
  text "A7" at 7178,7034 h30
  text "A4" at 6244,7032 h30
  text "A2" at 8032,7030 h30
  text "A1" at 8140,7030 h30
  text "A3" at 7934,7028 h30
  text "A0" at 8242,7028 h30
  text "A7" at 6536,6910 h30
  text "A3" at 7040,6906 h30
  text "A6" at 6640,6904 h30
  text "A5" at 6730,6904 h30
  text "A4" at 6828,6904 h30
  text "3.3" at 6918,6904 h30
  text "A2" at 7140,6904 h30
  text "A1" at 7238,6904 h30
  text "A0" at 7332,6904 h30
  text "C3" at 7430,6904 h30
  text "C2" at 7534,6904 h30
  text "C1" at 7640,6902 h30
  text "C0" at 7734,6902 h30
  text "B10" at 5916,6900 h30
  text "B1" at 6130,6900 h30
  text "B0" at 6232,6900 h30
  text "C5" at 6334,6900 h30
  text "GND" at 7822,6900 h30
  text "GND" at 7926,6900 h30
  text "3.3" at 8134,6900 h30
  text "B11" at 5828,6898 h30
  text "A14" at 7214,5856 h30
  text "A13" at 7116,5854 h30
  text "A15" at 7322,5852 h30
  text "C10" at 7418,5852 h30
  text "C7" at 6334,5850 h30
  text "C8" at 6440,5850 h30
  text "C9" at 6538,5850 h30
  text "A11" at 6920,5850 h30
  text "A12" at 7016,5850 h30
  text "D2" at 7534,5850 h30
  text "B3" at 7626,5850 h30
  text "B4" at 7728,5850 h30
  text "B5" at 7828,5850 h30
  text "B6" at 7936,5850 h30
  text "B7" at 8036,5850 h30
  text "B8" at 8134,5850 h30
  text "B9" at 8232,5850 h30
  text "B12" at 5820,5848 h30
  text "B14" at 6030,5848 h30
  text "C6" at 6234,5848 h30
  text "A10" at 6814,5848 h30
  text "B13" at 5924,5846 h30
  text "B15" at 6126,5846 h30
  text "A8" at 6640,5846 h30
  text "A9" at 6726,5846 h30
  text "A9" at 6912,5502 h30
  text "A8" at 6804,5500 h30
  text "C12" at 7792,5496 h30
  text "C11" at 7912,5496 h30
  text "C6" at 6266,5494 h30
  text "C7" at 6366,5494 h30
  text "A9 A10 GND" at 7144,5494 h35
  text "3V3   3V3" at 7210,5334 h35
  text "DIO" at 7786,5332 h30
  text "GND" at 7986,5332 h30
  text "CLK" at 7886,5330 h30
  text "3.3" at 7674,5328 h30
  text "GND     GND" at 6098,5326 h35
  text "5V" at 6938,5316 h35

## Dimensions
5360,7348 to 5182,5220 on Top Overlay
5528,7474 to 8410,7542 on Top Overlay

## Text inside footprints (layer, text, board x,y; h text height)
U2: Top Overlay "LM1117" at 5877.87,5399.13 h35 r90